# Altium PCB PCB1.PcbDoc
Units mil, origin at the board's own origin, x right, y up, seen from the top; angles counter-clockwise.
Board outline 2130.9 x 2130.96 mil, 2 copper layers (Top Layer, Bottom Layer); 68 components, 56 nets, 257 pads, 148 vias.
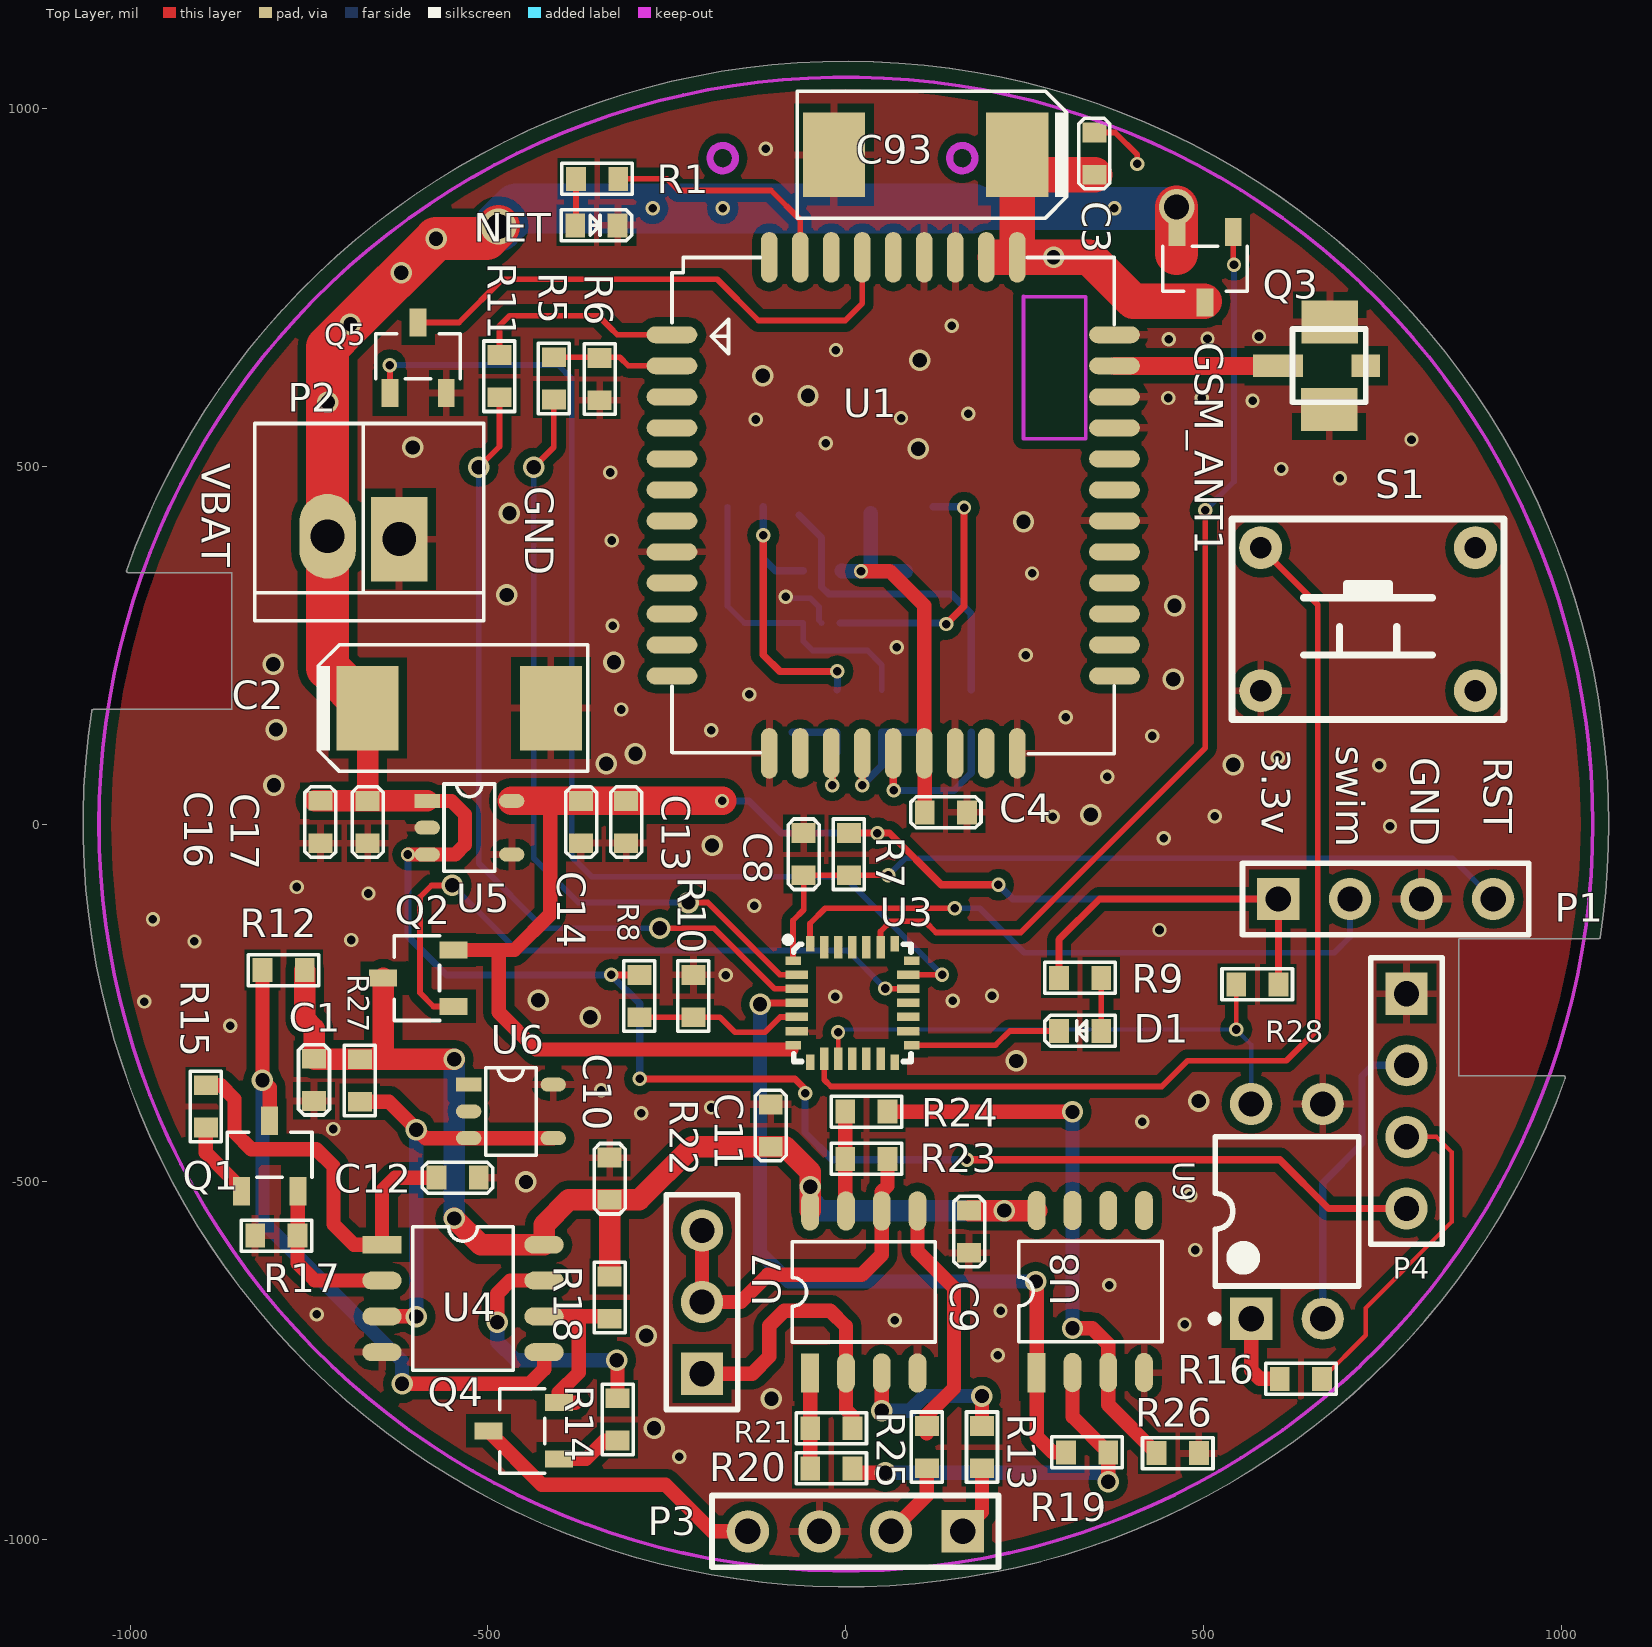
[diagram p0: Top Layer view]
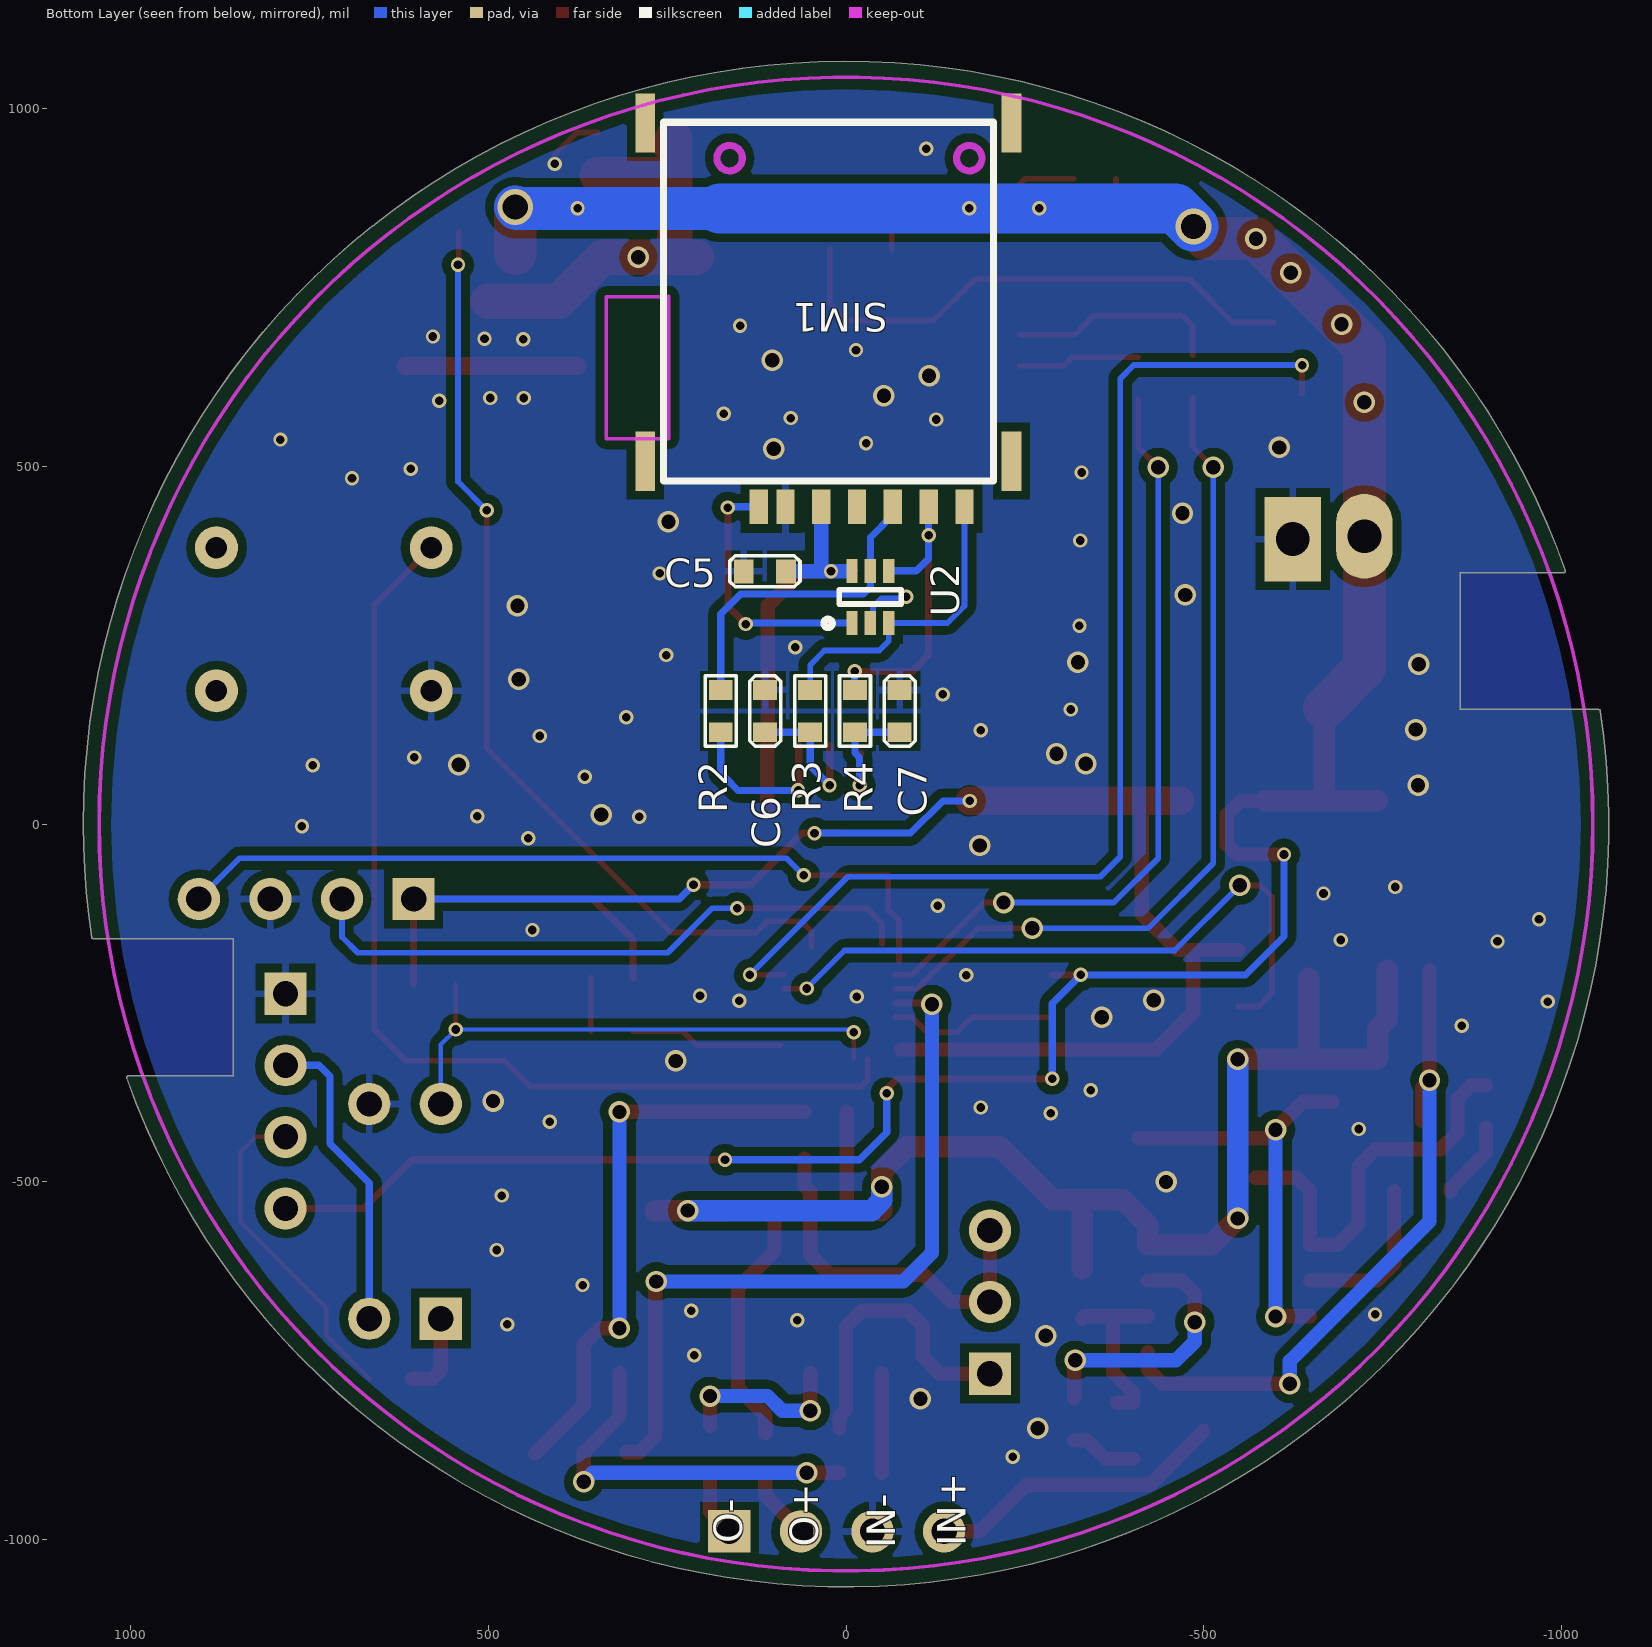
[diagram p1: Bottom Layer view, seen from below]

## Layer stack, top to bottom
Top Layer: signal copper 1.4
Dielectric: dielectric 12.6, FR-4, Dk 4.8
Bottom Layer: signal copper 1.4

## Board outline
-1051.28,160 -857.66,160 -857.66,350.97 -1001.99,350.97 cw(c-1001.99,353.48) -1003.05,351.2 cw(c-1002.44,353.64) -1004.81,354.48 cw(c0,0) 1065.51,0 cw(c0,0) 1053.72,-158.04 cw(c1051.23,-157.67) 1050.26,-159.98 cw(c1050,-157.48) 1050,-160 855.66,-160 855.66,-351.82 1001.84,-351.82 cw(c1002.21,-354.3) 1003.08,-351.95 cw(c1002.29,-354.33) 1004.8,-354.33 cw(c1002.29,-354.33) 1004.37,-355.75 cw(c0,0) -1053.79,157.57 cw(c-1051.28,157.48)

## Design rules (kind name [scope] priority, off if disabled: settings)
Clearance [InPoly] p1: gap=12
Clearance Clearance_1 [All] p2: gap=10
PolygonConnect [IsVia] p1: connectstyle=Direct reliefconductorwidth=10 reliefentries=4 polygonreliefangle="90 Angle"
RoutingVias [All] p1: holewidth=28 width=50 viastyle="Through Hole" minholewidth=28 minwidth=50 maxholewidth=28 maxwidth=50
SilkscreenOverComponentPads [All] p1: minsilkscreentomaskgap=1
SolderMaskExpansion [All] p1: expansion=4
Width [All] p1: maxlimit=200 minlimit=5 preferedwidth=10
27 further rules are at their usual default settings.

## Classes and differential pairs
component class GPRS: C3 C4 C5 C6 C7 C93 GSM_ANT1 NET Q3 Q5 R1 R2 R3 R4 R5 R6 R11 SIM1 U1 U2
component class MCU: C8 D1 P1 P4 R5 R7 R9 R10 R16 R28 S1 U3 U9
component class power: C1 C2 C9 C10 C11 C12 C13 C14 C16 C17 P2 P3 Q1 Q2 Q4 Q6 R12 R13 R14 R15 R17 R18 R19 R20 R21 R22 R23 R24 R25 R26 R27 U4 U5 U6 U7 U8

## Components (designator, comment, footprint, x,y, rotation, side; value= is the part's Value field where it differs from the comment)
C1 "0.1uF/10V" 0603C -743,-327.74 r270 top
C2 "100uF/6.3V" 7343 -668,162 r0 top
C3 "0.1uF/10V" 0603C 347,907 r90 top
C4 "220nF/10V" 0603C 169,16.26 r180 top
C5 "33pF/10V" 0603C 143,353 r180 bottom
C6 "33pF/10V" 0603C 113,128.26 r90 bottom
C7 "33pF/10V" 0603C -75,128.2 r90 bottom
C8 "0.1uF/10V" 0603C -59,-71.74 r90 top
C9 "0.1uF/10V" 0603C 172,-539.88 r270 top
C10 "0.1uF/10V" 0603C -330,-525 r90 top
C11 "0.1uF/10V" 0603C -105,-450.74 r90 top
C12 "0.1uF/10V" 0603C -572,-494 r0 top
C13 "0.1uF/10V" 0603C -307,32.26 r270 top
C14 "10uF/10V" 0603C -370,-26.8 r90 top
C16 "10uF/10V" 0603C -734,-26.74 r90 top
C17 "0.1uF/10V" 0603C -668,32.26 r270 top
C93 "1000uF/6.3V" 7343 239.28,935 r180 top
D1 "LED0" 0603LED 356.67,-288.96 r180 top
GSM_ANT1 "IPX" IPX 676,691 r90 top
NET "LED" 0603LED -378,836.26 r0 top
P1 "Header 4" HDR1X4 604,-104.74 r0 top
P2 "Header 2" 2X2.54MM -624,398 r180 top
P3 "Header 4" HDR1X4 163,-988 r180 top
P4 "Header 4" HDR1X4 783,-237 r270 top
Q1 "S8050" SOT23-3 -844.26,-513 r270 top
Q2 "SI2343" SOT23-3 -548,-254.74 r0 top
Q3 "SI2343" SOT23-3 541,827 r90 top
Q4 "MMBT9015" SOT23-3 -401,-887 r0 top
Q5 "S8050" SOT23-3 -637,602 r270 top
R1 "1K" 0603r -377,901.26 r0 top
R2 "10R/5%" 0603R 175,187.26 r270 bottom
R3 "10R/5%" 0603R 50,187.26 r270 bottom
R4 "10R/5%" 0603R -12.5,187.26 r270 bottom
R5 "10K" 0603R -408,593 r90 top
R6 "140K" 0603R -344,650.95 r270 top
R7 "10K" 0603R 4,-71.74 r90 top
R8 "100K" 0603R -288.65,-269.8 r90 top
R9 "1K" 0603R 297.67,-214.96 r0 top
R10 "100K" 0603R -213,-210.74 r270 top
R11 "1K" 0603R -484,655 r270 top
R12 "10K" 0603R -815,-204 r0 top
R13 "10K" 0603R 190,-900 r90 top
R14 "1K" 0603R -319,-802 r270 top
R15 "1K" 0603R -894,-365 r270 top
R16 "1K" 0603R 606,-775 r0 top
R17 "10K" 0603R -825,-575 r0 top
R18 "1.15K/1%" 0603R -330,-632 r270 top
R19 "100K" 0603R 366.45,-877.74 r180 top
R20 "2.2K" 0603R -50,-900 r0 top
R21 "100K" 0603R 9.06,-844 r180 top
R22 "100K" HDR1X3 -201,-767.74 r90 top
R23 "100K" 0603R -1,-467.74 r0 top
R24 "2.2K" 0603R -1,-401.74 r0 top
R25 "10K" 0603R 113,-900 r90 top
R26 "100K" 0603R 493,-878.74 r180 top
R27 "2K" 0603R -679,-328.74 r270 top
R28 "10K" 0603R 545,-224 r0 top
S1 "SW-PB" key 579.34,386.02 r270 top
SIM1 "nano sim" "Nano SIM" 122,443.26 r0 bottom
U1 "SIM800C" SIM800C -243,683.26 r0 top
U2 "SMF05C" SC70-6L -34,317.26 r90 bottom
U3 "STM8L151G4U6" UFQFPN28 -70,-190.74 r0 top
U4 "LM258" so-8 -648,-587.74 r0 top
U5 "TLV70230DBVR" SOT23-5(DBV) -585,32.26 r0 top
U6 "TLV431AIDBVRG4" SOT23-5(DBV) -527,-364 r0 top
U7 "LM258" so-8 -50,-766.74 r90 top
U8 "LM258" so-8 266.45,-766.26 r90 top
U9 "TL181" DIP-4 616,-541 r90 top

## Footprints (in the part's own frame and the unit in brackets; to place one, negate y for a bottom-side part, rotate by r counter-clockwise, add the part's x,y. Pads: shape width x height; smd on the part's side, far side on the other; paste and mask are expansions set on the pad)
2X2.54MM [mm]
  rect 2x3 hole 1.2: 1(0,0)
  oval 2x3 hole 1.2: 2(2.54,-0.1)
  silkscreen extent -3,-4.1 5.13,2.9
0603C [mm]
  rect 0.7x0.85 smd: 1(0,0) 2(1.5,0)
  silkscreen extent -0.5,-0.55 2,0.55
0603LED [mm]
  rect 0.7x0.85 smd: 1(0,0) 2(1.5,0)
  silkscreen extent -0.5,-0.55 2,0.55
0603r [mm]
  rect 0.7x0.85 smd: 1(0,0) 2(1.5,0)
  silkscreen extent -0.5,-0.55 2,0.55
0603R [mm]
  rect 0.7x0.85 smd: 1(0,0) 2(1.5,0)
  silkscreen extent -0.5,-0.55 2,0.55
7343 [mm]
  rect 2.2x3 smd: 1(0,0) 2(6.5,0)
  silkscreen extent -1.75,-2.25 7.8,2.25
DIP-4 [mm] "DIP; 4 Leads; Row Spacing 7.62 mm; Pitch 2.54 mm"
  rect 1.5x1.5 hole 0.9: 1(-3.81,1.27)
  round 1.5 hole 0.9: 3(-3.81,-1.27) 4(3.81,-1.27) 6(3.81,1.27)
  silkscreen extent -3.93,-2.55 2.65,2.69, body extent -3.15,-2.5 3.15,2.5, height 5.6
HDR1X3 [mm] "Connector; Header; 3 Position"
  rect 1.5x1.5 hole 0.9: 1(0,0)
  round 1.5 hole 0.9: 2(2.54,0) 3(5.08,0)
  silkscreen extent -1.27,-1.27 6.35,1.27
HDR1X4 [mm] "Connector; Header; 4 Position"
  rect 1.5x1.5 hole 0.9: 1(0,0)
  round 1.5 hole 0.9: 2(2.54,0) 3(5.08,0) 4(7.62,0)
  silkscreen extent -1.27,-1.27 8.89,1.27
IPX [mil]
  rect 60x78.74 smd: 1(10.36,0) 3(-112,1)
  rect 31.5x70 smd: 2(-51,72.36)
  rect 31.5x39.37 smd: ""(-51,-50)
  silkscreen extent -102,-50 0,52
key [mil]
  round 60 hole 30: 1(0,0) 2(200,0) 3(0,300) 4(200,300)
  silkscreen extent -40,-40 240,340
"Nano SIM" [mm]
  rect 0.7x2.1 smd: 0(-8.97,-13.615) 0(-8.97,-1.615) 0(4.02,-13.615) 0(4.02,-1.615)
  rect 0.65x1.23 smd: 1(-2.22,0) 2(-4.76,0) 3(-7.3,0) 5(-0.95,0) 6(-3.49,0) 7(-6.03,0) 8(0,0)
  Keep-Out Layer circle w0.254: c1.03,-12.365 r0.45
  Keep-Out Layer circle w0.254: c-7.47,-12.365 r0.45
  silkscreen extent -8.33,-13.64 3.38,-0.91
SC70-6L [mm]
  rect 0.85x0.4 smd: 1(-0.925,0.65) 2(-0.925,0) 3(-0.925,-0.65) 4(0.925,-0.65) 5(0.925,0) 6(0.925,0.65)
  silkscreen extent -1.09,-1.1 0.25,1.65
SIM800C [mm]
  oval 1.8x0.6 smd: 1(0,0) 2(0,-1.1) 3(0,-2.2) 4(0,-3.3) 5(0,-4.4) 6(0,-5.5) 7(0,-6.6) 8(0,-7.7) 9(0,-8.8) 10(0,-9.9) 11(0,-11) 12(0,-12.1) 22(15.7,-12.1) 23(15.7,-11) 24(15.7,-9.9) 25(15.7,-8.8) 26(15.7,-7.7) 27(15.7,-6.6) 28(15.7,-5.5) 29(15.7,-4.4) 30(15.7,-3.3) 31(15.7,-2.2) 32(15.7,-1.1) 33(15.7,0)
  oval 0.6x1.8 smd: 13(3.45,-14.85) 14(4.55,-14.85) 15(5.65,-14.85) 16(6.75,-14.85) 17(7.85,-14.85) 18(8.95,-14.85) 19(10.05,-14.85) 20(11.15,-14.85) 21(12.25,-14.85) 34(12.25,2.75) 35(11.15,2.75) 36(10.05,2.75) 37(8.95,2.75) 38(7.85,2.75) 39(6.75,2.75) 40(5.65,2.75) 41(4.55,2.75) 42(3.45,2.75)
  Keep-Out Layer lines w0.127: 12.471,1.372 12.471,-3.683 14.681,-3.683 14.681,1.346 12.522,1.346
  silkscreen extent 0,-14.86 15.7,2.74
so-8 [mil]
  rect 55x25 smd: 1(0,0)
  oval 55x25 smd: 2(0,-50) 3(0,-100) 4(0,-150) 5(226.38,-150) 6(226.38,-100) 7(226.38,-50) 8(226.38,0)
  silkscreen extent 43,-175 183,25
SOT23-3 [mm]
  rect 1x0.6 smd: 1(0,0) 2(0,2) 3(-2.5,1)
  silkscreen extent -2.1,-0.5 -0.5,2.5
SOT23-5(DBV) [mm]
  rect 0.9x0.5 smd: 1(0,0)
  oval 0.9x0.5 smd: 2(0,-0.95) 3(0,-1.9) 4(3,-1.9) 5(3,0)
  silkscreen extent 0.6,-2.5 2.4,0.6
UFQFPN28 [mm]
  rect 0.55x0.3 smd: 1(-0.1,0) 7(-0.1,-3) 15(4.11,-3) 21(4.11,0)
  rect 0.8x0.3 smd: 2(0.025,-0.5) 3(0.025,-1) 4(0.025,-1.5) 5(0.025,-2) 6(0.025,-2.5) 16(3.985,-2.5) 17(3.985,-2) 18(3.985,-1.5) 19(3.985,-1) 20(3.985,-0.5)
  rect 0.3x0.55 smd: 8(0.505,-3.605) 14(3.505,-3.605) 22(3.505,0.605) 28(0.505,0.605)
  rect 0.3x0.8 smd: 9(1.005,-3.48) 10(1.505,-3.48) 11(2.005,-3.48) 12(2.505,-3.48) 13(3.005,-3.48) 23(3.005,0.48) 24(2.505,0.48) 25(2.005,0.48) 26(1.505,0.48) 27(1.005,0.48)
  silkscreen extent -0.37,-3.58 4.08,0.83

## Part data
C1 C3 C4 C5 C6 C7 C8 C9 C10 C11 C13 C14 C16 C17: library part Cap, "Capacitor"
C2 C93: library part "Cap Pol1", "Polarized Capacitor (Radial)"
C12: library part CAP, "Capacitor"
D1: "Typical INFRARED GaAs LED"
GSM_ANT1: library part IPEX, "IPEX座"
NET: library part LED2, "Typical RED, GREEN, YELLOW, AMBER GaAs LED"
P1 P3 P4: "Header, 4-Pin"
P2: "Header, 2-Pin"
Q1 Q5: library part NPN
Q2 Q3: library part BUK92150-55A, "BUK92150-55A"
Q4: library part PNP
R1: library part R
R2 R3 R4 R5 R6 R9 R11: library part Res2, "Resistor"
R7 R8 R10 R12 R13 R14 R15 R16 R17 R18 R19 R20 R21 R23 R24 R25 R26 R27 R28: library part R, "R"
R22: library part RPot, "Potentiometer"
S1: "Switch"
U6: library part TPS76318
U9: library part Optoisolator1, "4-Pin Phototransistor Optocoupler"

## Via types
v1: diameter 20, hole 12, Top Layer to Bottom Layer, tented both sides, 91 vias
v2: diameter 30, hole 20, Top Layer to Bottom Layer, tented both sides, 55 vias
v3: diameter 50, hole 35, Top Layer to Bottom Layer, tented both sides, 2 vias

## Nets (pads, with @x,y where several pads share a name; then routed paths per layer and width w, separated by ;. In a path a pad name is that pad's centre, name@x,y a point inside that pad or via, vN(x,y) a via of type N, cw(c..) or ccw(c..) an arc to the next point about the centre after c; other vN are vias at no path point)
1.24V_REF1: R27.2 U4.3 U6.3 U6.4 | length 599.6
  Top Layer w20: R27.2 -638.2,-387.8 -587.2,-438.8 U6.3 U6.4 ; U4.3 -600.26,-687.74 v2(-600,-688)
  Bottom Layer w20: v2(-600,-688) v2@-600,-427.75
  other v2: -600,-427
CURR_EN1: U3.8
FLOW: R28.1 U3.10 U9.6 | length 769.9
  Top Layer w6: U3.10 v1@-10.75,-291.25 ; v1(545,-287) R28.1
  Bottom Layer w6: v1(-11,-291) -7,-287 v1(545,-287) 566,-308 U9.6
GND: C1.2 C2.2 C3.2 C4.1 C5.1 C6.2 C7.2 C8.2 C9.2 C10.2 C11.2 C12.2 C13.2 C14.1 C16.1 C17.2 C93.2 GSM_ANT1.1 GSM_ANT1.3 NET.2 P1.3 P2.1 P3.3 P4.1 Q5.2 R6.2 R10.1 R17.1 R26.1 S1.2 SIM1.5 U1.8 U1.13 U1.19 U1.21 U1.27 U1.30 U1.31 U1.33 U1.36 U1.37 U2.2 U3.6 U4.4 U5.2 U5.4 U6.5 U7.4 U8.4 U9.4 | length 162.1
  Top Layer w8: C3.2 375.94,966.06 407,935 v1(407,922)
  Bottom Layer w8: v1(-84,317.26) -84,316.95 -82.31,315.26 -49.6,315.26 -37.72,303.37 -37.72,284.56 U2.2
  other v1: -233,-884 212,-742 473,-699 68,-693 -739,-685 216,-680 368,-644 488,-595 481,-519 -716,-426 414,-416 -286,-404 -188,-396 -342,-372 -860,-282 -980,-248 149,-247 -15,-241 204,-240 -168,-211 -910,-164 -691,-162 438,-148 -968,-133 -128,-114 -667,-97 -767,-88 444,-20 760,-3 289,10 515,11 365,66 745,82 603,93 428,123 -188,131 307,149 -314,160 -135,181 251,236 71,247 -326,277 260,350 -327,396 690,483 -329,491 608,496 -28,532 790,537 -126,565 77,567 171,573 568,591 450,595 497,595 -14,662 451,677 505,678 577,681 148,696 -112,943
  other v2: -268,-844 -104,-803 -279,-715 -447,-500 493,-387 238,-331 -357,-270 -430,-246 -187,-30 342,13 -799,54 541,83 -335,84 -294,98 -796,132 457,202 -800,223 -324,226 459,305 -474,320 248,422 -470,434 101,524 -605,526 -53,598 -116,626 103,648
NetC12_1: C12.1 R15.1 U4.1 | length 572.4
  Top Layer w20: R15.1 -873,-365 -854,-384 -854,-431 -830.74,-454.26 -739.74,-454.26 -715.87,-478.13 -715.87,-559 -687.13,-587.74 U4.1 -648,-512 -630,-494 C12.1
NetD1_1: D1.1 R9.2 | length 74
  Top Layer w8: D1.1 D1.1 R9.2
NetD1_2: D1.2 U3.15 | length 214
  Top Layer w8: U3.15 208.89,-308.85 228.78,-288.96 D1.2
NetGSM_ANT1_2: GSM_ANT1.2 U1.32 | length 240.5
  Top Layer w25: U1.32 GSM_ANT1.2@615.64,639.95
NetNET_1: NET.1 R1.1 | length 65.4
  Top Layer w8: NET.1 -377,837.26 R1.1
NetP4_2: P4.2 U9.3 | length 430
  Bottom Layer w10: U9.3 666,-501.39 721,-446.39 721,-352 736,-337 P4.2
NetQ1_1: Q1.1 R15.2 | length 109.5
  Top Layer w20: R15.2 -894,-459.21 -844.26,-508.95 Q1.1
NetQ1_2: Q1.2 R17.2 U4.2 | length 228.5
  Top Layer w20: R17.2 -765.94,-613.57 -741.78,-637.74 U4.2 ; R17.2@-765.52,-575 Q1.2
NetQ1_3: Q1.3 R12.1 U4.5 | length 950.3
  Top Layer w20: R12.1 v2(-815,-357.89) -804.89,-368 Q1.3 ; v2(-620,-782) -442,-782 -421.62,-761.62 U4.5
  Bottom Layer w20: v2(-815,-357.89) -815,-555 -620,-750 v2(-620,-782)
NetQ4_1: Q4.1 R14.2 | length 92.7
  Top Layer w20: Q4.1 -363,-887 -337.06,-861.06 R14.2
NetQ4_2: Q4.2 R18.2 U4.6 | length 280.2
  Top Layer w20: -389.26,-687.74 U4.6 -373,-687.74 ; -378.26,-808.26 Q4.2 -401,-794 -373,-766 -373,-687.74 ; R18.2 -333.31,-687.74 -373,-687.74
NetR1_2: R1.2 U1.41 | length 319.3
  Top Layer w8: R1.2 -250,901.26 -233.74,885 -104.74,885 -63.87,844.13 U1.41@-63.87,802.53
NetR2_1: R2.1 SIM1.2 U2.5 | length 444.1
  Bottom Layer w10: SIM1.2@-65.4,431.66 -34,400.26 U2.5 -34,331.26 -24,321.26 147,321.26 175,293.26 R2.1
NetR3_1: R3.1 SIM1.3 U2.3 | length 438
  Bottom Layer w8: SIM1.3 -165.4,304.66 -141.58,280.84 U2.3 -59.59,255.44 -46.41,242.26 30,242.26 50,222.26 R3.1
NetR4_1: R4.1 SIM1.7 U2.4 | length 441.6
  Top Layer w10: v1(-115.4,403.26) -115.4,236.26 -92.4,213.26 v1(-12,213.26)
  Bottom Layer w10: SIM1.7 v1(-115.4,403.26) -115.4,370.66 -98.42,353.68 U2.4 ; R4.1 -12,187.76 v1(-12,213.26)
NetR13_2: R13.2 U7.3 | length 264.7
  Top Layer w20: v2(50,-819.74) U7.3 ; 190,-819.74 R13.2 v2(190,-799)
  Bottom Layer w20: v2(50,-819.74) 89,-819.74 109.74,-799 v2(190,-799)
NetR14_1: R14.1 U4.7 | length 371.1
  Top Layer w20: v2(-487,-695.74) -487,-656 -468.74,-637.74 U4.7 ; v2(-320,-749) -319,-750 R14.1
  Bottom Layer w20: v2(-487,-695.74) -487,-723 -461,-749 v2(-320,-749)
NetR16_1: R16.1 U9.1 | length 117
  Top Layer w20: U9.1 566,-763 578,-775 R16.1
NetR19_1: R19.1 R20.2 U8.2 | length 535.9
  Top Layer w20: R20.2@9.06,-906 v2(55,-906) ; U8.2 316.45,-827.74 R19.1 v2(366.45,-918.74)
  Bottom Layer w20: v2(55,-906) 353.71,-906 v2(366.45,-918.74)
NetR20_1: R20.1 R21.2 U7.1 | length 139.3
  Top Layer w20: R20.1@-50,-906 U7.1
NetR21_1: R21.1 R22.1 U7.2 | length 417.8
  Top Layer w20: R22.1 -131,-767.74 -107,-743.74 -107,-700.74 -86,-679.74 -22,-679.74 0,-701.74 U7.2 0,-817.74 9.06,-826.8 R21.1
NetR22_2: R22.2 R22.3 R23.2 U7.6 | length 515.7
  Top Layer w20: R22.3 R22.2 -147,-667.74 -109,-629.74 22,-629.74 50,-601.74 U7.6 50,-513.74 58.06,-505.69 R23.2
NetR23_1: R23.1 R24.1 U7.7 | length 139
  Top Layer w20: R24.1 R23.1 -1,-539.36 U7.7
NetR24_2: R24.2 R26.2 U8.3 | length 799.4
  Top Layer w20: R24.2 v2@316,-401.74 ; v2(316.45,-704.29) 344.22,-704.29 366.45,-726.52 U8.3 366.45,-811.24 R26.2
  Bottom Layer w20: v2(316.45,-704.29) v2(316.45,-402.19)
NetR25_2: R25.2 U7.5 | length 350.3
  Top Layer w20: U7.5 100,-596.74 151,-647.74 151,-788 113,-826 R25.2@113,-840.74 ; R25.2@111,-842.74 R25.2@113,-840.74 ; R25.2@113,-850.94 R25.2@113,-840.74
NetS1_1: S1.1 U3.9 | length 1461.8
  Top Layer w8: U3.9 -30.43,-357.31 -21,-366.74 441,-366.74 477,-330.74 615,-330.74 659,-286.74 659,306.36 S1.1
NetSIM1_8: SIM1.8 U2.1 | length 363.3
  Top Layer w10: v1(140,279.26) 165,304.26 v1(165,442)
  Bottom Layer w10: U2.1 138.42,280.84 v1@139,280.26 ; SIM1.8 162.74,443.26 v1@164,442
OUT+: P3.2 R25.1 | length 98.7
  Top Layer w20: P3.2 113,-938 R25.1@113,-910
OUT-: P3.1 R13.1 | length 92.2
  Top Layer w20: P3.1 190,-961 R13.1@190,-907
P1: P3.4 Q4.3 | length 421
  Top Layer w20: Q4.3 -499.43,-848.36 -424.91,-922.87 -252.13,-922.87 -187,-988 P3.4
POWER: Q3.1 U3.23 | length 1331
  Top Layer w8: U3.23 48.31,-151.43 ; 48.31,-150.08 62.64,-135.74 110,-135.74 125.69,-151.43 244.31,-151.43 502,106.26 v1(502,438.26) ; Q3.1 541,782 v1(542,781)
  Bottom Layer w8: v1(502,438.26) 542,478.26 v1(542,781)
PWRKEY: Q5.3 U1.39 | length 754.7
  Top Layer w8: Q5.3 -540.57,700.43 -480,761 -179.74,761 -122,703.26 -1,703.26 22.75,727.01 U1.39@22.75,802.53
PWRKEY_IN: Q5.1 U3.20 | length 1601.4
  Top Layer w8: Q5.1 v1(-637,641) ; U3.20 v1@134.13,-210.43
  Bottom Layer w8: v1(-637,641) -402,641 -383,622 -383,508 -383,-45.74 -355,-73.74 -2.55,-73.74 v1(134.24,-210.53)
RST: C8.1 P1.4 R7.1 U3.1 | length 1121.7
  Top Layer w8: U3.1 -73.94,-134.68 -59,-119.74 C8.1 R7.1 v1(59,-71.74)
  Bottom Layer w8: v1(59,-71.74) 83,-47.74 847,-47.74 P1.4
RXD: R11.2 U3.3 | length 1179.3
  Top Layer w8: v2(-513,498.26) -512,499.26 -484,527.26 R11.2 ; v2(-260,-145.74) -184,-145.74 -99.63,-230.11 U3.3
  Bottom Layer w8: v2(-513,498.26) -513,-54.74 -422,-145.74 v2(-260,-145.74)
SENSOR_EN: Q2.1 U3.19 | length 966.2
  Top Layer w8: v2(-550,-85.74) -579,-85.74 -595,-101.74 -595,-235.74 -576,-254.74 Q2.1 ; v1(55,-229.74) 55.37,-230.11 U3.19
  Bottom Layer w8: v2(-550,-85.74) -459,-176.74 -339,-176.74 ; -368,-176.74 -339,-176.74 ; v1(55,-229.74) 2,-176.74 -339,-176.74
SENSOR_OUT: R19.2 U3.4 U8.1 | length 1065.1
  Top Layer w10: v2@-118.06,-249.8 U3.4
  Top Layer w20: v2(265,-639) 266.45,-640.45 U8.1 266.45,-855.48 288.71,-877.74 R19.2
  Bottom Layer w20: v2(-120,-251.74) -120,-599 -80,-639 v2(265,-639)
SIM800_VBAT: C3.1 C93.1 Q3.3 U1.34 U1.35 | length 587.1
  Top Layer w50: 209,791.53 U1.34 323,791.53 339.73,791.53 401.19,730.07 Q3.3@500.13,730.07 ; U1.34@239.28,802.53 C93.1 C93.1@239.28,957.54 ; C93.1@241,959.26 C93.1@239.28,957.54 ; C93.1@244.28,907 C3.1 ; C93.1@246.57,950.26 C93.1@239.28,957.54
  other v2: 290,791.53
SIM_RX: R5.2 R6.1 U1.2 | length 170
  Top Layer w8: R5.2 -316,652.06 -303.9,639.95 U1.2
SIM_TX: R11.1 U1.1 | length 298.9
  Top Layer w8: R11.1 -484,696 -470,710 -346,710 -330,694 -319.26,683.26 U1.1
SIMC_CLK: C6.1 R3.2 U1.16 | length 203.6
  Top Layer w10: U1.16@22.75,109.61 U1.16 22.75,54.51 v1(23,54.26)
  Bottom Layer w10: v1(23,54.26) 50,81.26 R3.2 112.94,128.2 C6.1
SIMC_DATA: C7.1 R4.2 U1.15 | length 184.1
  Top Layer w10: U1.15 -19,97.05 v1(-19,54.26)
  Bottom Layer w10: C7.1 R4.2 -12.5,99 -19,92.5 v1(-19,54.26)
SIMC_RST: R2.2 U1.17 | length 236.7
  Top Layer w10: v1@66.05,47.95 U1.17 U1.17@66.05,109.61
  Bottom Layer w10: v1(67,47) 150.74,47 167.87,64.13 175,71.26 R2.2
SWIM: P1.2 U3.28 | length 878.7
  Top Layer w8: U3.28 -50.12,-138.86 -29,-117.74 v1(152,-117.74)
  Bottom Layer w8: v1(152,-117.74) 187,-117.74 249,-179.74 682,-179.74 704,-157.74 P1.2
TXD: R5.1 U3.2 | length 1086.7
  Top Layer w8: v2(-436,498.26) -408,526.26 R5.1 ; v2(-220,-109.74) -193,-109.74 -92.31,-210.43 U3.2
  Bottom Layer w8: v2(-436,498.26) -436,-47.74 -374,-109.74 v2(-220,-109.74)
VBAT: C2.1 C16.2 C17.1 P2.2 P4.4 Q3.2 R8.2 U5.1 U5.3 | length 4197.5
  Top Layer w10: v1(-328,-210.74) R8.2 ; v1(-288,-356) -71,-356 -57,-370 v1(-57,-376) ; v1(169,-469) 606,-469 674,-537 P4.4
  Top Layer w20: v1(-611.8,-42.54) U5.3 -545.8,-42.54 -532,-28.74 -532,13.26 -551,32.26 U5.1
  Top Layer w30: C16.2@-742.06,32.31 C16.2 -733.94,32.26 C17.1 ; C2.1 C17.1 ; U5.1 C17.1
  Top Layer w60: C2.1 -724,218 P2.2 v2(-724,589) -724,666.3 v2(-692.13,698.17) v2(-572.58,817.72) -508.89,817.72 ; v3@-502.23,817.72 v3(-485.51,834.45) ; 462,797 v3(462,862)
  Bottom Layer w10: v1(-611.8,-42.54) -611.8,-156.94 -558,-210.74 v1(-328,-210.74) -288,-250.74 v1(-288,-356) ; v1(-57,-376) -57,-431 -19,-469 v1(169,-469)
  Bottom Layer w60: 176,860 316,860 ; v1@382,860 316,860 ; v3(462,862) 460,860 316,860
  Bottom Layer w70: v3(-485.51,834.45) -459.96,860 176,860
  other v1: -270,860 -172,860 375,860
  other v2: -621,770
VBAT_ADC: R8.1 R10.2 U3.5 | length 237.3
  Top Layer w8: R8.1 R10.2 -175.94,-269.8 -155,-290.74 -113,-290.74 -91.74,-269.48 U3.5 ; R10.2@-227.76,-269.8 R10.2@-227.65,-269.69
VCC_3V: C13.1 C14.2 P1.1 Q2.2 R7.2 R9.1 R28.2 U3.7 U5.5 | length 2502
  Top Layer w10: R7.2 43.94,-12.69 v1(44,-12.74) 61,-12.74 133,-84.74 v1(213,-84.74) ; R9.1 297.67,-161.07 354,-104.74 P1.1 604,-223.94 R28.2
  Top Layer w20: Q2.2 -485,-176 ; -413,32.26 -413,-126 -463,-176 -485,-176 ; -76.02,-315.07 -337,-315.07 -432.93,-315.07 -485,-263 -485,-176
  Top Layer w40: U5.5 -413,32.26 C14.2 C13.1 v1(-173,32.26)
  Bottom Layer w10: v1(-173,32.26) -135.26,32.26 -90.26,-12.74 v1(44,-12.74) ; v1(213,-84.74) 233,-104.74 P1.1
VCC_3V_SENSOR: C1.1 C9.1 C10.1 C11.1 Q2.3 R12.2 R18.1 R27.1 U4.8 U7.8 U8.8 | length 1804.5
  Top Layer w30: R12.2 -755.94,-272.8 -743,-285.74 C1.1 -742,-328.74 R27.1 -657,-328.74 ; Q2.3 -646.43,-318.17 -657,-328.74 ; v2(-547,-551) -510.26,-587.74 U4.8 -421.62,-559.62 -387,-525 C10.1 ; v2(-547,-328.74) -657,-328.74 ; R18.1@-330,-621 C10.1 ; U7.8 v2(-50,-506.74) -50,-485.74 -85,-450.74 C11.1 -214.74,-450.74 -289,-525 C10.1 ; C9.1 v2(221.14,-539.88) U8.8
  Bottom Layer w30: v2(-547,-551) v2(-547,-328.74) ; v2@-50,-508.74 -50,-525.74 -35.86,-539.88 v2(221.14,-539.88)
VCC_5V: P4.3 R16.2 | length 463.6
  Top Layer w6: R16.2 726,-714.06 726,-676 846,-556 846,-458 825,-437 P4.3
VCC_EXT: U1.40
VSIM: C4.2 C5.2 SIM1.1 U1.18 U2.6 | length 568.5
  Top Layer w20: v1(21,353.26) 61.28,353.26 109.36,305.18 109.36,109.61 109.94,109.03 C4.2
  Bottom Layer w20: U2.6@-6.13,353.68 U2.6@-5.45,353.68 ; U2.6@-5.45,353 C5.2 ; 34.6,353 SIM1.1@34.6,434
pads on no net: GSM_ANT1. S1.3 S1.4 SIM1.0 SIM1.6 U1.3 U1.4 U1.5 U1.6 U1.7 U1.9 U1.10 U1.11 U1.12 U1.14 U1.20 U1.22 U1.23 U1.24 U1.25 U1.26 U1.28 U1.29 U1.38 U1.42 U3.11 U3.12 U3.13 U3.14 U3.16 U3.17 U3.18 U3.21 U3.22 U3.24 U3.25 U3.26 U3.27 U6.1 U6.2 U8.5 U8.6 U8.7

## Polygon pours and split planes (outlines as drawn)
GND on Top Layer "Top Layer-No Net" (solid, remove dead copper, pour order 1000): -1337,1273 -1304,1306 857,1306 857,1055 1471,441 1404,374 1404,-586 1097,-586 583,-1100 567,-1116 -684,-1116 -728,-1116 -1063,-781 -1236,-608 -1236,190 -1236,816 -740,1312
GND on Bottom Layer "Top Layer-No Net" (solid, remove dead copper, pour order 1001): -1208,1267 1035,1267 1296,1006 1420,882 1420,-240 1420,-493 950,-963 774,-1139 -602,-1139 -798,-1139 -1202,-735 -1280,-657 -1280,269 -1280,1195 -1208,1267

## Keep-outs
Keep-Out Layer:
  circle w5: c0,0 r1043.31

## Silkscreen, mask and mechanical layers (free items; w line width, h text height)
Top Overlay:
  text "VBAT" at -900,504 h40 r270
  text "GND" at -448,472 h40 r270
  text "swim" at 685,109.26 h40 r270
  text "3.3v" at 581,105.26 h40 r270
  text "GND" at 789,93.26 h40 r270
  text "RST" at 891,93.26 h40 r270
Bottom Overlay:
  text "O-" at 145,-1004.74 h40 r270
  text "IN+" at -167,-1008.74 h40 r270
  text "O+" at 39,-1009.74 h40 r270
  text "IN-" at -69,-1011.74 h40 r270
Mechanical 1:
  lines w5: -1051.28,157.37 ccw(c0,0) 1002.21,-354.3 ; -1051.28,157.48 -855.15,157.48 -855.15,353.48 -1001.99,353.48 ; -1002.44,353.64 cw(c0,0) 1051.23,-157.67 ; -826.77,0 cw(c-905.51,0) -826.77,0.49 ; 853.15,-354.33 1002.29,-354.33 ; 853.15,-353.48 853.15,-157.48 1050,-157.48 ; 984.25,0 cw(c905.51,0) 984.25,0.49